# EAGLE board AmbaSat-1 version 2.02 (EAGLE 9.5.1)
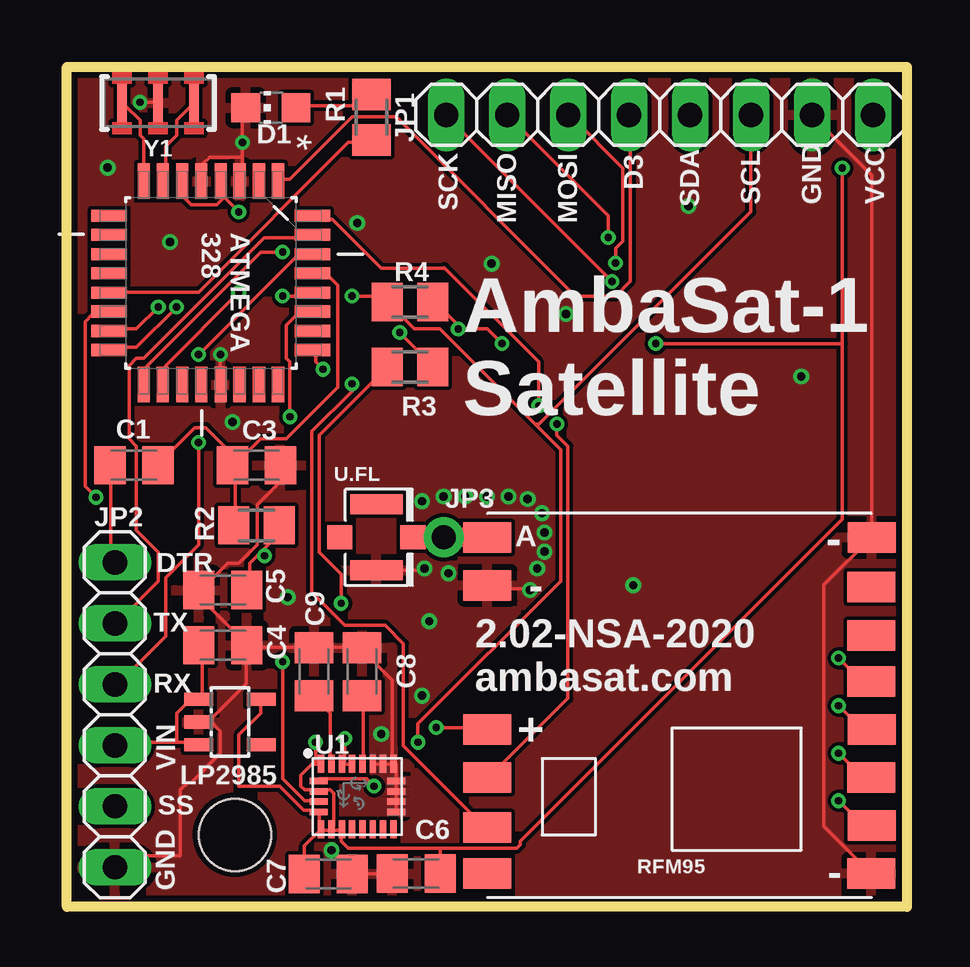
[diagram p0: board, top side]
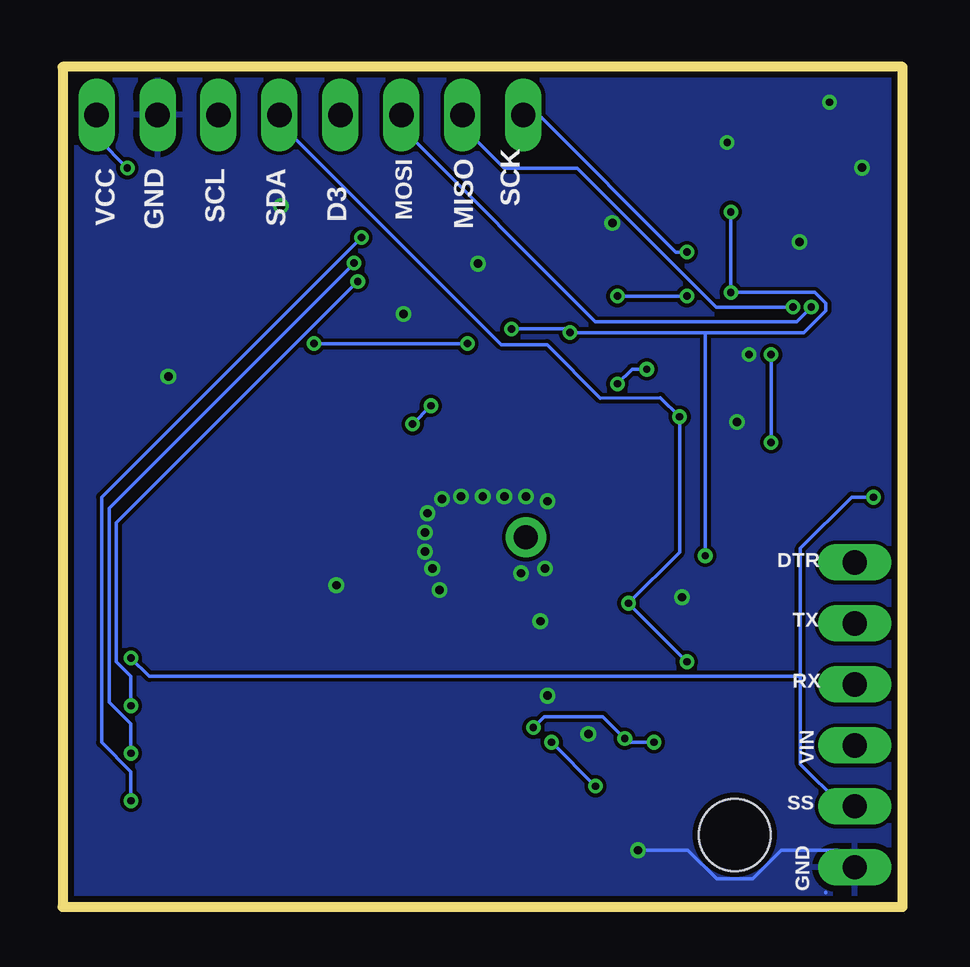
[diagram p1: board, bottom side, seen from below]

Size 35 x 35 mm. Coordinates in mm from the lower left corner, seen from the top.
Outline: 0,0 0,35 35,35 35,0 0,0
Copper layers (1*16): Top 0.035mm / dielectric 1.5mm / Bottom 0.035mm
Design rules "SeeedStudio_2layer_DRU_no_angle_20140221": minimum track width 6mil, minimum drill 12mil, track to track 6mil, track to pad 6mil, pad to pad 6mil, via to via 6mil, smd to smd 0mil, copper to edge 10mil, drill to drill 10mil, minimum pad ring 10mil, minimum via ring 6mil, stop-mask expansion 2mil, vias tented up to drill 100mil, thermal gap 10mil
Holes 3 mm at 7,3

## Footprints (pad centres in the part's own frame; a part is rotated, then mirrored left to right if it is on the bottom)
QFP80P900X900X120-32N = smd 1.473 x 0.508: 1 -4.242,2.794; 2 -4.242,2.007; 3 -4.242,1.194; 4 -4.242,0.406; 5 -4.242,-0.406; 6 -4.242,-1.194; 7 -4.242,-2.007; 8 -4.242,-2.794; 17 4.242,-2.794; 18 4.242,-2.007; 19 4.242,-1.194; 20 4.242,-0.406; 21 4.242,0.406; 22 4.242,1.194; 23 4.242,2.007; 24 4.242,2.794 | smd 0.508 x 1.473: 9 -2.794,-4.242; 10 -2.007,-4.242; 11 -1.194,-4.242; 12 -0.406,-4.242; 13 0.406,-4.242; 14 1.194,-4.242; 15 2.007,-4.242; 16 2.794,-4.242; 25 2.794,4.242; 26 2.007,4.242; 27 1.194,4.242; 28 0.406,4.242; 29 -0.406,4.242; 30 -1.194,4.242; 31 -2.007,4.242; 32 -2.794,4.242
C0805K = smd 1.3 x 1.6: 1 -1,0; 2 1,0
CHIP-LED0805 = smd 1.2 x 1.2: A 0,-1.05; C 0,1.05
1X08 = drill 1.016 long: 1 -8.89,0; 2 -6.35,0; 3 -3.81,0; 4 -1.27,0; 5 1.27,0; 6 3.81,0; 7 6.35,0; 8 8.89,0
1X06 = drill 1.016 long: 1 -6.35,0; 2 -3.81,0; 3 -1.27,0; 4 1.27,0; 5 3.81,0; 6 6.35,0
1X01_ROUND = drill 1 pad 1.676: 1 0,0
SOT25 = smd 0.55 x 1.2: 1 -0.95,-1.3; 2 0,-1.3; 3 0.95,-1.3; 4 0.95,1.3; 5 -0.95,1.3
M0805 = smd 1.3 x 1.6: 1 -0.95,0; 2 0.95,0
RFM95 = smd 2 x 1.27: ANT 5.777,-7; DIO0 5.777,3; DIO1 5.779,5.095; DIO2 5.779,7; DIO5 -10.225,-4.936; GND 5.777,-5; GND1 -10.223,7; GND2 -10.23,-7; MISO -10.23,5; MOSI -10.225,3; NSS -10.223,-1; RST -10.223,-2.905; SCK -10.23,1.012; VDD 5.777,1
LGA24-8X4 = smd 0.27 x 0.75: 1 -1.505,1.365; 6 -1.505,-1.365; 7 -1.075,-1.365; 8 -0.645,-1.365; 9 -0.215,-1.365; 10 0.215,-1.365; 11 0.645,-1.365; 12 1.075,-1.365; 13 1.505,-1.365; 18 1.505,1.365; 19 1.075,1.365; 20 0.645,1.365; 21 0.215,1.365; 22 -0.215,1.365; 23 -0.645,1.365; 24 -1.075,1.365 | smd 0.75 x 0.27: 2 -1.615,0.645; 3 -1.615,0.215; 4 -1.615,-0.215; 5 -1.615,-0.645; 14 1.615,-0.645; 15 1.615,-0.215; 16 1.615,0.215; 17 1.615,0.645
U.FL = smd 2.2 x 0.85: 1 0,1.375; 2 0,-1.375 | smd 1.05 x 1: FEED 1.525,0; NC -1.525,0
RESONATOR-SMD-4.5X2.0 = smd 0.4 x 1.6: 1 -1.5,0; 2 0,0; 3 1.5,0

## Placement (x,y rotation side)
ATMEGA328P-AU  ATMEGA328P-AU  [QFP80P900X900X120-32N]  6,26 270 top
C1  1uF  [C0805K]  2.8,18.4 180 top
C3  0.1uF  [C0805K]  7.9,18.4 0 top
C4  1uF  [C0805K]  6.5,10.9 0 top
C5  2.2uF  [C0805K]  6.5,13.2 180 top
C6  10uF  [C0805K]  14.55,1.39 180 top
C7  0.1uF  [C0805K]  10.9,1.37 0 top
C8  10nF  [C0805K]  12.3,9.8 90 top
C9  0.1uF  [C0805K]  10.3,9.8 90 top
D1  [CHIP-LED0805]  8.5,33.3 90 top
JP1  [1X08]  24.7,33 180 top
JP2  [1X06]  2,8 90 top
JP3  [1X01_ROUND]  15.7,15.4 0 top
LP2985  LP2985AIM5-3.3  [SOT25]  6.8,7.7 270 top
R1  1k6  [M0805]  12.7,32.9 270 top
R2  10k  [M0805]  7.9,15.9 0 top
R3  1K  [M0805]  14.3,22.5 0 top
R4  1K  [M0805]  14.3,25.2 0 top
RFM95  RFM95  [RFM95]  23.3,8.4 180 top
U1  LSM9DS1  [LGA24-8X4]  12.1,4.6 0 top
U.FL  U.FL  [U.FL]  12.9,15.4 0 top
Y1  4MHz  [RESONATOR-SMD-4.5X2.0]  3.8,33.5 180 top

## Library data of the parts
ATMEGA328P-AU = Atmel-ATMEGA328P-AU; DESCRIPTION: 8-bit Microcontroller with In-System Programmable Flash; MPN: ATMEGA328P-AU; OC_FARNELL: 1715486; OC_NEWARK: 14R4631; PACKAGE: TQFP-32; SUPPLIER: Atmel
C1 C3-C9 R1-R4 = rcl
D1 = led
JP1 JP2 = pinhead
JP3 = microbuilder
LP2985 = LP2985
RFM95 = _c2h
U1 = LSM9DS1; PROD_ID: IC-12536
U.FL = SparkFun-Connectors; PROD_ID: CONN-09193; SF_ID: WRL-09144
Y1 = SparkFun-Clocks; PROD_ID: XTAL-12492

## Nets
A0: ATMEGA328P-AU.23
AREF: ATMEGA328P-AU.20
D3: ATMEGA328P-AU.1 JP1.5
DIO0: ATMEGA328P-AU.32 RFM95.DIO0
DIO1: ATMEGA328P-AU.25 RFM95.DIO1
GND: ATMEGA328P-AU.3 ATMEGA328P-AU.5 ATMEGA328P-AU.21 C3.2 C4.2 C5.2 C6.2 C7.2 C8.2 C9.2 D1.C JP1.2 JP2.1 LP2985.2 RFM95.GND RFM95.GND1 RFM95.GND2 U1.14 U1.15 U1.16 U1.17 U1.18 U1.19 U1.20 U.FL.2 Y1.2
MISO: ATMEGA328P-AU.16 JP1.7 RFM95.MISO
MOSI: ATMEGA328P-AU.15 JP1.6 RFM95.MOSI
N$2: ATMEGA328P-AU.8 Y1.3
N$4: D1.A R1.1
N$5: JP3.1 RFM95.ANT U.FL.FEED
N$6: C1.2 JP2.6
N$7: C9.1 U1.24
N$8: C8.1 U1.21
NS$1: ATMEGA328P-AU.7 Y1.1
NS$3: ATMEGA328P-AU.13 R1.2
RESET: ATMEGA328P-AU.29 C1.1 C3.1 R2.1
RX: ATMEGA328P-AU.30 JP2.4
SCK: ATMEGA328P-AU.17 JP1.8 RFM95.SCK
SCL: ATMEGA328P-AU.28 JP1.3 R4.1 U1.2
SDA: ATMEGA328P-AU.27 JP1.4 R3.1 U1.4
SS: ATMEGA328P-AU.14 JP2.2 RFM95.NSS
TX: ATMEGA328P-AU.31 JP2.5
VCC: ATMEGA328P-AU.4 ATMEGA328P-AU.6 ATMEGA328P-AU.18 C5.1 C6.1 C7.1 JP1.1 LP2985.5 R2.2 R3.2 R4.2 RFM95.VDD U1.1 U1.3 U1.5 U1.6 U1.7 U1.8 U1.22 U1.23
VIN: C4.1 JP2.3 LP2985.1 LP2985.3

## Tracks (layer width: path | path; a pad name or v marks a point on that pad's centre or on a via)
D3
  Top 0.152: ATMEGA328P-AU.1 8.84,30.33 9.3,30.33 11.89,32.92 13.72,32.92 21.18,25.45 22.86,25.45 23.47,26.06 23.47,32.92 JP1.5
DIO0  (via drill 0.3)
  Top 0.152: v19.66,20.88 19.66,22.71 15.73,26.63 15.7,26.6 13.1,26.6 11.05,28.65 10.36,28.65 ATMEGA328P-AU.32 | v20.42,20.12 20.42,19.66 20.88,19.2 20.88,8.69 17.53,5.33 RFM95.DIO0
  Bottom 0.152: v20.42,20.12 v19.66,20.88
DIO1  (via drill 0.3)
  Top 0.152: v10.67,22.4 10.36,22.71 10.36,23.16 ATMEGA328P-AU.25 | v11.89,21.79 11.89,21.49 10.21,19.81 10.21,13.11 11.58,11.73 13.26,11.73 14.02,10.97 14.02,6.71 17.37,3.35 RFM95.DIO1
  Bottom 0.152: v10.67,22.4 11.28,22.4 v11.89,21.79
GND  (via drill 0.3, 0.35)
  Top 0.152: U1.20 12.8,5.94 13.11,5.94 U1.19 13.26,5.94 13.56,5.94 U1.18 | U1.14 13.72,3.96 13.72,4.27 U1.15 13.72,4.42 13.72,4.72 U1.16 13.72,4.88 13.72,5.18 U1.17 13.72,5.33 13.72,5.94 U1.18 | U1.18 13.56,6.1 13.56,9.45 12.34,10.67 C8.2 12.19,10.82 10.36,10.82 C9.2 10.21,10.82 7.62,10.82 C4.2 | 5.94,7.77 5.64,7.77 LP2985.2 5.94,7.77 | 5.94,7.77 7.47,9.3 7.47,10.82 C4.2 | C4.2 7.47,10.97 5.64,12.8 5.64,13.11 C5.2 5.64,13.26 6.71,14.33 7.16,14.33 7.92,15.09 7.92,16.76 8.84,17.68 8.84,18.29 C3.2 | RFM95.GND1 33.38,1.52 31.55,3.35 31.55,13.41 RFM95.GND2 33.53,15.54 33.53,30.48 31.09,32.92 JP1.2 | 7.32,31.24 7.32,30.33 ATMEGA328P-AU.3 | 7.32,31.24 v7.32,31.85 7.32,33.22 D1.C | 7.32,31.24 5.94,31.24 5.64,30.94 5.64,30.33 ATMEGA328P-AU.5 | v6.4,23.01 6.4,21.79 ATMEGA328P-AU.21 | v3.05,33.53 3.66,33.53 Y1.2 | RFM95.GND 17.53,13.26 19.2,13.26 v19.3,13.2 | U.FL.2 12.95,14.02 14.78,14.02 v14.9,14.1 | JP2.1 2.13,1.68 2.59,2.13 4.72,2.13 4.72,4.88 5.03,5.18 5.18,5.18 6.4,6.4 6.4,7.32 5.94,7.77 | C6.2 13.54,1.37 C7.2 11.01,2.26 11,2.26 11.03,2.29 v11.03,2.36
  Bottom 0.152: 3.2,0.61 3.2,0.58 | JP2.1 2.71,2.36 5.05,2.36 6.24,1.17 7.76,1.17 8.95,2.36 v11.03,2.36
  other vias: 14.8,16.9 15.7,17.1 16.6,17.1 17.5,17.1 18.4,17.1 19.2,17 19.8,16.4 19.9,15.6 19.9,14.8 19.6,14.1 15.9,13.9 15.1,11.9 13.1,7.2 14.8,8.8 6.9,20.2 9.2,12.9 23.6,13.4 30.6,22.1 12.1,28.5 17.7,26.8 25.9,29.2 20.8,24.7 4.3,27.7 1.7,30.8
  pour Bottom: 0,35 35.2,35 35.2,0 0,0
  pour Top: 0,35 35,35.1 35,0.1 0,0
MISO  (via drill 0.3)
  Top 0.152: v4.57,24.99 2.9,23.32 1.83,23.32 ATMEGA328P-AU.16 | v32.16,4.42 33.07,3.5 33.53,3.5 RFM95.MISO | v22.55,27.89 22.55,28.8 18.44,32.92 JP1.7
  Bottom 0.152: v4.57,24.99 7.77,24.99 13.56,30.79 16.61,30.79 18.29,32.46 18.29,32.92 JP1.7 | v32.16,4.42 32.16,5.64 33.38,6.86 33.38,17.07 v22.55,27.89
MOSI  (via drill 0.3)
  Top 0.152: v3.81,24.99 2.9,24.08 1.83,24.08 ATMEGA328P-AU.15 | v32.16,6.4 33.07,5.49 33.38,5.49 RFM95.MOSI | v22.86,26.82 22.86,27.43 23.16,27.74 23.16,30.79 21.03,32.92 JP1.6
  Bottom 0.152: v3.81,24.99 4.42,24.38 12.8,24.38 20.88,32.46 20.88,32.92 JP1.6 | v32.16,6.4 32.16,7.62 33.07,8.53 33.07,16.61 v22.86,26.82
N$2
  Top 0.152: ATMEGA328P-AU.8 3.2,30.33 3.2,32 3.05,32.16 3.05,32.77 2.44,33.38 Y1.3
N$4
  Top 0.152: D1.A 9.6,33.38 12.19,33.38 12.65,33.83 R1.1
N$5
  Top 0.254: JP3.1 RFM95.ANT
  Top 0.813: RFM95.ANT U.FL.FEED
N$6
  Top 0.152: C1.2 1.83,18.29 1.83,14.63 1.98,14.48 JP2.6
N$7
  Top 0.152: U1.24 10.97,6.1 10.97,8.08 10.36,8.69 C9.1
N$8
  Top 0.152: U1.21 12.34,6.1 12.34,8.69 C8.1
NS$1
  Top 0.152: ATMEGA328P-AU.7 4.12,30.33 4.12,31.7 4.57,32.16 4.57,32.77 5.18,33.38 Y1.1
NS$3
  Top 0.152: ATMEGA328P-AU.13 1.83,25.6 5.49,25.6 11.73,31.85 12.65,31.85 R1.2
RESET
  Top 0.152: 7.16,18.59 7.01,18.44 C3.1 | 7.16,18.59 8.08,19.51 9.14,19.51 11.28,21.64 11.28,25.91 10.82,26.36 10.36,26.36 ATMEGA328P-AU.29 | R2.1 7.01,16 7.01,18.29 C3.1 | 7.16,18.59 5.79,19.96 5.33,19.96 3.81,18.44 C1.1 | 7.16,18.59 C3.1
RX  (via drill 0.3)
  Top 0.152: v5.49,23.01 9.6,27.13 10.21,27.13 ATMEGA328P-AU.30 | v5.49,19.36 5.49,15.09 4.12,13.72 4.12,11.28 2.13,9.3 JP2.4
  Bottom 0.152: v5.49,19.36 v5.49,23.01
SCK  (via drill 0.3)
  Top 0.152: v8.99,27.28 8.08,27.28 3.35,22.55 3.35,21.79 ATMEGA328P-AU.17 | v32.16,8.38 33.07,7.47 33.53,7.47 RFM95.SCK | v22.71,26.06 15.85,32.92 JP1.8
  Bottom 0.152: v8.99,27.28 9.45,27.28 15.09,32.92 15.7,32.92 JP1.8 | v32.16,8.38 32.16,9.6 32.77,10.21 32.77,16 v22.71,26.06
SCL  (via drill 0.3)
  Top 0.152: v12.8,5.03 12.5,5.33 10.52,5.33 U1.2 | v14.63,6.86 14.63,7.62 20.57,13.56 20.57,19.05 19.51,20.12 | 19.51,20.12 15.54,24.08 14.48,24.08 13.41,25.15 R4.1 13.26,25.3 13.11,25.45 v11.89,25.45 | v8.99,25.45 10.21,25.45 ATMEGA328P-AU.28 | 19.51,20.12 19.66,20.12 28.5,28.96 28.5,32.92 JP1.3
  Bottom 0.152: v14.63,6.86 v12.8,5.03 | v11.89,25.45 v8.99,25.45
SDA  (via drill 0.3)
  Top 0.152: v8.99,10.21 8.99,5.33 9.91,4.42 10.36,4.42 U1.4 | v11.43,12.65 11.43,13.87 10.52,14.78 10.52,19.66 13.26,22.4 R3.1 | v9.3,20.42 9.3,22.71 9.14,22.86 9.14,24.23 9.6,24.69 10.21,24.69 ATMEGA328P-AU.27
  Bottom 0.152: v8.99,10.21 v11.43,12.65 9.3,14.78 v9.3,20.42 10.1,21.22 12.6,21.2 14.82,23.42 16.73,23.42 25.91,32.6 25.91,32.92 JP1.4
SS  (via drill 0.3)
  Top 0.152: v1.22,17.07 0.76,17.53 0.76,24.38 1.07,24.69 1.68,24.69 ATMEGA328P-AU.14 | v32.16,10.36 33.07,9.45 33.38,9.45 RFM95.NSS
  Bottom 0.152: v1.22,17.07 2.13,17.07 4.27,14.94 4.27,9.6 | 4.27,9.6 4.27,5.94 2.59,4.27 2.13,4.27 JP2.2 | v32.16,10.36 31.39,9.6 4.27,9.6
TX
  Top 0.152: ATMEGA328P-AU.31 10.21,27.89 8.23,27.89 3.2,22.86 2.9,22.86 2.59,22.55 2.59,19.51 2.9,19.2 2.9,15.7 3.81,14.78 3.81,13.56 2.13,11.89 JP2.5
VCC  (via drill 0.3)
  Top 0.152: U1.6 10.52,3.35 10.52,3.96 U1.5 10.36,3.96 10.3,4.02 9.87,4.02 8.87,5.03 7.16,5.03 7.16,7.16 8.08,8.08 8.08,8.53 LP2985.5 | U1.7 11.12,3.35 11.12,4.72 10.97,4.88 10.52,4.88 U1.3 10.36,4.88 9.91,4.88 9.75,5.03 9.75,5.49 10.21,5.94 10.36,5.94 | 8.08,14.78 8.84,15.54 8.84,15.85 R2.2 | 8.08,14.78 7.62,14.33 7.62,13.26 C5.1 | v7.16,25.6 4.12,22.55 4.12,21.79 ATMEGA328P-AU.18 | 6.55,29.57 v7.16,28.96 | 6.55,29.57 6.55,30.18 ATMEGA328P-AU.4 6.55,29.57 | 6.55,29.57 6.25,29.26 5.18,29.26 4.88,29.57 4.88,30.18 ATMEGA328P-AU.6 | v13.87,23.93 15.24,22.55 R3.2 | R4.2 15.39,25.15 16.31,24.23 v16.31,24.08 17.53,24.08 v18.14,23.47 | v8.23,14.63 8.08,14.78 | U1.22 11.89,5.94 11.58,5.94 U1.23 11.58,6.1 v11.58,7.01 | 11.43,3.2 11.12,3.2 U1.7 | U1.7 10.97,3.2 10.67,3.2 U1.6 | 10.36,5.94 10.52,5.94 U1.1 | 10.36,5.94 v10.36,6.86 | v15.39,7.47 17.37,7.47 RFM95.VDD | 32.31,23.47 32.31,16.15 18.9,2.74 18.9,2.59 18.75,2.44 15.54,2.44 | 32.31,23.47 v32.31,30.79 | 15.54,2.44 11.73,2.44 11.43,2.74 11.43,3.2 | 11.43,3.2 U1.8 | 32.31,23.47 v24.54,23.47 | C6.1 15.55,2.43 15.54,2.44 | C7.1 9.9,2.54 U1.6
  Bottom 0.152: v7.16,28.96 v7.16,25.6 3.66,25.6 3.2,25.15 3.2,24.84 4.12,23.93 8.23,23.93 | 8.23,23.93 v13.87,23.93 14.02,24.08 v16.31,24.08 | 8.23,23.93 v8.23,14.63 | v10.36,6.86 11.43,6.86 v11.58,7.01 12.5,7.92 14.94,7.92 v15.39,7.47 | v32.31,30.79 33.53,32 33.53,32.92 JP1.1 | v24.54,23.47 v18.14,23.47
VIN
  Top 0.152: C4.1 5.64,10.82 5.64,8.69 LP2985.1 5.49,8.53 5.03,8.53 4.57,8.08 4.57,6.86 | 4.57,6.86 2.13,6.86 JP2.3 | 4.57,6.86 5.49,6.86 LP2985.3

## Text on the board
tPlace: SCK | MISO | MOSI | D3 | SDA | SCL | GND | VCC | ATMEGA / 328 | AmbaSat-1 / Satellite | DTR | TX | RX | 2.02-NSA-2020 / ambasat.com | VIN | SS | RFM95 | GND
bPlace: SDA | SCL | GND | VCC | D3 | SCK | MOSI | MISO | DTR | TX | RX | VIN | SS | GND